# Altium PCB BubblePCB.PcbDoc
Units mm, origin at the board's own origin, x right, y up, seen from the top; angles counter-clockwise.
Board outline 171.22 x 55.3 mm, 2 copper layers (Top Layer, Bottom Layer); 45 components, 64 nets, 196 pads, 3 vias.
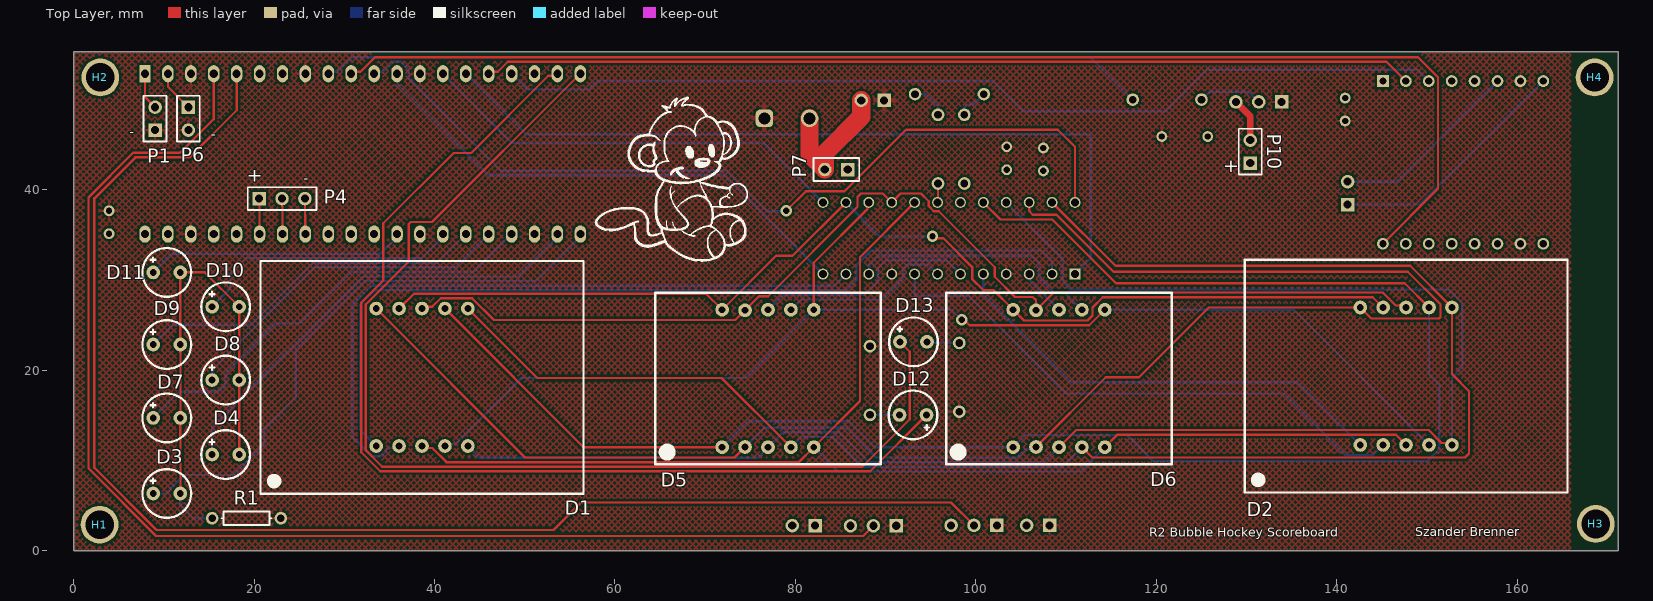
[diagram p0: Top Layer view]
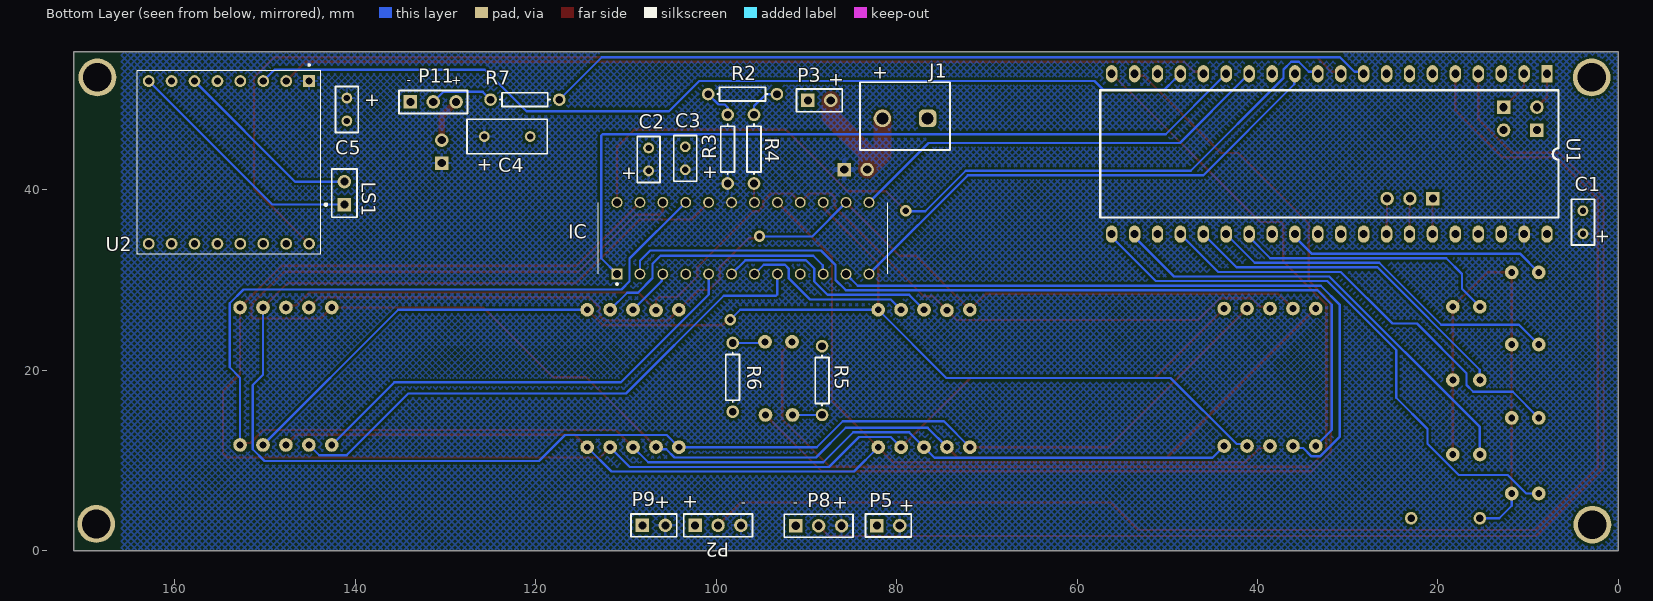
[diagram p1: Bottom Layer view, seen from below]

## Layer stack, top to bottom
Top Solder: solder mask 0.0102, Solder Resist, Dk 3.5
Top Layer: signal copper 0.0356
Dielectric 1: dielectric 0.32, FR-4, Dk 4.8
Bottom Layer: signal copper 0.0356
Bottom Solder: solder mask 0.0102, Solder Resist, Dk 3.5

## Board outline
0,0 0,55.296 171.221,55.296 171.221,0

## Design rules (kind name [scope] priority, off if disabled: settings)
Clearance [All] p1: gap=0.254 ignorepadtopadclearanceinfootprint=FALSE
ComponentClearance [All] p1: gap=0 collisioncheckmode=3 verticalgap=0 showdistances=TRUE
HoleSize [All] p1: absolutevalues=TRUE maxlimit=3.175 minlimit=0.025 maxpercent=80.000 minpercent=20.000
PolygonConnect [All] p1: connectstyle=Relief reliefconductorwidth=0.254 reliefentries=4 polygonreliefangle="90 Angle" airgapwidth=0.254
RoutingVias [All] p1: holewidth=0.711 width=1.27 viastyle="Through Hole" minholewidth=0.711 minwidth=1.27 maxholewidth=0.711 maxwidth=1.27
SilkToSolderMaskClearance [IsPad] p1: minsilkscreentomaskgap=0.229 clearancetoexposedcopper=TRUE
SolderMaskExpansion [All] p1: expansion=0.102 istentingtop=FALSE
SupplyNets "Schematic Supply Nets_1" [InNet('VCC')] p1: voltage=0.000
SupplyNets "Schematic Supply Nets" [InNet('GND')] p2: voltage=0.000
UnRoutedNet [All] p1: checkbadconnections=TRUE
Width [All] p1: maxlimit=5.08 minlimit=0.254 preferedwidth=0.254
26 further rules are at their usual default settings.

## Components (designator, comment, footprint, x,y, rotation, side; value= is the part's Value field where it differs from the comment)
C1 "Cap" RAD-0.1 3.912,36.398 r270 bottom value=10uF
C2 "Cap" RAD-0.1 107.493,43.358 r90 bottom value=10uF
C3 "Cap" RAD-0.1 103.429,43.485 r90 bottom value=0.1uF
C4 "Cap" RAD-0.2 123.165,45.898 r180 bottom value=1000uF
C5 "Cap" RAD-0.1 140.945,48.895 r270 bottom value=10uF
D1 "8021HA" PCBComponent_1 38.608,19.202 r0 top
D2 "8021HA" PCBComponent_1 147.701,19.329 r0 top
D3 "LED1" LED#1 10.312,6.325 r0 top
D4 "LED1" LED#1 16.84,10.643 r0 top
D5 "CL5621AH" CL5621AH 76.962,19.075 r0 top
D6 "CL5621AH" CL5621AH 109.22,19.075 r0 top
D7 "LED1" LED#1 10.312,14.707 r0 top
D8 "LED1" LED#1 16.84,18.898 r0 top
D9 "LED1" LED#1 10.312,22.835 r0 top
D10 "LED1" LED#1 16.84,27.026 r0 top
D11 "LED1" LED#1 10.312,30.836 r0 top
D12 "LED1" LED#2 93.04,15.037 r180 top
D13 "LED1" LED#1 93.091,23.139 r0 top
H1 "Hole 125mil" "Hole 125mil" 2.87,2.87 r0 top
H2 "Hole 125mil" "Hole 125mil" 2.946,52.451 r0 top
H3 "Hole 125mil" "Hole 125mil" 168.732,2.946 r0 top
H4 "Hole 125mil" "Hole 125mil" 168.605,52.451 r0 top
IC "MAX7219CNG" DIP794W47P254L3213H457Q24 97.028,34.62 r90 bottom
J1 "691137710002" 691137710002 79.07,48.158 r0 bottom
LS1 "Speaker" PIN2 141.224,38.354 r90 bottom
P1 "Select_BTN" HDR1X2 9.017,46.609 r90 top
P2 "BeamBreakReceiver2" HDR1X3 102.337,2.794 r180 bottom
P3 "DC_JACK_IN" HDR1X2 89.84,49.911 r180 bottom
P4 "Volume_POT" HDR1X3 20.549,39.014 r0 top
P5 "BeamBreakEmitter2" HDR1X2 82.194,2.769 r180 bottom
P6 "Start/RST_BTN" HDR1X2 12.7,49.149 r270 top
P7 "PWR_Switch" HDR1X2 85.801,42.24 r180 top
P8 "BeamBreakReceiver1" HDR1X3 91.186,2.743 r180 bottom
P9 "BeamBreakEmitter1" HDR1X2 108.179,2.794 r180 bottom
P10 "LED_Switch" HDR1X2 130.429,42.951 r90 top
P11 "NeoPixel" HDR1X3 133.909,49.733 r180 bottom
R1 "Res1" AXIAL-0.3 19.152,3.581 r0 top value=220
R2 "Res1" AXIAL-0.3 97.079,50.597 r0 bottom value=10K
R3 "Res1" AXIAL-0.3 98.73,44.501 r270 bottom value=10K
R4 "Res1" AXIAL-0.3 95.809,44.501 r90 bottom value=10K
R5 "Res1" AXIAL-0.3 88.265,18.847 r90 bottom value=220
R6 "Res1" AXIAL-0.3 98.171,19.202 r270 bottom value=220
R7 "Res1" AXIAL-0.3 121.209,49.987 r180 bottom value=330
U1 "Raspberry Pi Pico" "Raspberry Pi Pico" 7.899,52.857 r270 bottom
U2 "DFR0299" MODULE_DFR0299 154.026,43.028 r270 bottom

## Footprints (in the part's own frame and the unit in brackets; to place one, negate y for a bottom-side part, rotate by r counter-clockwise, add the part's x,y. Pads: shape width x height; smd on the part's side, far side on the other; paste and mask are expansions set on the pad)
691137710002 [mm] "Horizontal Cable Entry with Pressure Clamp, pitch 5mm, 02p"
  rrect50% 1.95x1.95 hole 1.3: 1(-2.5,0.25)
  round 1.95 hole 1.3: 2(2.5,0.25)
  silkscreen extent -5,-3.75 5,3.75, body extent -5,-3.75 5,3.75, height 11.6
AXIAL-0.3 [mm] "Axial Device, Thru-Hole; 2 Leads; 0.3 in Pin Spacing"
  round 1.4 hole 0.85: 1(-3.81,0) 2(3.81,0)
  silkscreen extent -2.77,-0.76 2.77,0.76
CL5621AH [mil] "7 Segment DIsplay 10 Pin Common Cathode"
  round 60 hole 30: 1(-200,-300) 2(-100,-299.21) 3(0,-300) 4(100,-300) 5(200,-300) 6(200,300) 7(100,300) 8(0,300) 9(-100,297.64) 10(-200,300)
  silkscreen extent -492,-374 492,374
DIP794W47P254L3213H457Q24 [mm]
  rect 1.21x1.21 hole 0.86: 1(-3.97,13.97)
  round 1.21 hole 0.86: 2(-3.97,11.43) 3(-3.97,8.89) 4(-3.97,6.35) 5(-3.97,3.81) 6(-3.97,1.27) 7(-3.97,-1.27) 8(-3.97,-3.81) 9(-3.97,-6.35) 10(-3.97,-8.89) 11(-3.97,-11.43) 12(-3.97,-13.97) 13(3.97,-13.97) 14(3.97,-11.43) 15(3.97,-8.89) 16(3.97,-6.35) 17(3.97,-3.81) 18(3.97,-1.27) 19(3.97,1.27) 20(3.97,3.81) 21(3.97,6.35) 22(3.97,8.89) 23(3.97,11.43) 24(3.97,13.97)
  silkscreen extent -5.17,-16.06 3.94,16.06
HDR1X2 [mm] "Connector; Header; 2 Position"
  rect 1.5x1.5 hole 0.9: 1(0,0)
  round 1.5 hole 0.9: 2(2.54,0)
  silkscreen extent -1.27,-1.27 3.81,1.27
HDR1X3 [mm] "Connector; Header; 3 Position"
  rect 1.5x1.5 hole 0.9: 1(0,0)
  round 1.5 hole 0.9: 2(2.54,0) 3(5.08,0)
  silkscreen extent -1.27,-1.27 6.35,1.27
"Hole 125mil" [mil]
  round 165 hole 125: 1(0,0)
LED#1 [mil]
  round 60 hole 30: 1(-59.05,0) 2(59.06,0)
  silkscreen extent -106,-106 106,106
LED#2 [mil]
  round 60 hole 30: 1(-59.06,0) "  "(59.05,0)
  silkscreen extent -106,-106 106,106
MODULE_DFR0299 [mm]
  rect 1.308x1.308 / inner round 1.308 / far side rect 1.308x1.308 hole 0.8: 1(-9.017,8.89)
  round 1.308 hole 0.8: 2(-9.017,6.35) 3(-9.017,3.81) 4(-9.017,1.27) 5(-9.017,-1.27) 6(-9.017,-3.81) 7(-9.017,-6.35) 8(-9.017,-8.89) 9(9.017,-8.89) 10(9.017,-6.35) 11(9.017,-3.81) 12(9.017,-1.27) 13(9.017,1.27) 14(9.017,3.81) 15(9.017,6.35) 16(9.017,8.89)
  silkscreen extent -10.9,-10.16 10.16,10.16, body extent -10.16,-10.16 10.16,10.16, height 6.25
PCBComponent_1 [mil]
  round 60 hole 30: 1(-200,-300) 2(-100,-300) 3(0,-300) 4(100,-300) 5(200,-300) 6(200,300) 7(100,300) 8(0,300) 9(-100,300) 10(-200,300)
  silkscreen extent -705,-508 705,508
PIN2 [mm] "Photosensitive Diode; 2 Leads"
  rect 1.5x1.5 hole 0.9: 1(0,0)
  round 1.5 hole 0.9: 2(2.54,0)
  silkscreen extent -1.4,-1.4 3.94,2.18
RAD-0.1 [mm] "Radial Cap, Thru-Hole; 2 Leads; 0.1 in Pin Spacing"
  round 1.2 hole 0.7: 1(-1.27,0) 2(1.27,0)
  silkscreen extent -2.54,-1.27 2.54,1.27
RAD-0.2 [mm] "Radial Cap, Thru-Hole; 2 Leads; 0.2 in Pin Spacing"
  round 1.2 hole 0.7: 1(-2.54,0) 2(2.54,0)
  silkscreen extent -4.44,-1.91 4.44,1.91
"Raspberry Pi Pico" [mil]
  rect 75x50 hole 35: 1(0,0)
  oval 75x50 hole 35: 2(0,-100) 3(0,-200) 4(0,-300) 5(0,-400) 6(0,-500) 7(0,-600) 8(0,-700) 9(0,-800) 10(0,-900) 11(0,-1000) 12(0,-1100) 13(0,-1200) 14(0,-1300) 15(0,-1400) 16(0,-1500) 17(0,-1600) 18(0,-1700) 19(0,-1800) 20(0,-1900) 21(700,-1900) 22(700,-1800) 23(700,-1700) 24(700,-1600) 25(700,-1500) 26(700,-1400) 27(700,-1300) 28(700,-1200) 29(700,-1100) 30(700,-1000) 31(700,-900) 32(700,-800) 33(700,-700) 34(700,-600) 35(700,-500) 36(700,-400) 37(700,-300) 38(700,-200) 39(700,-100) 40(700,0)
  silkscreen extent 72,-1950 628,50

## Part data
C1 C2 C3 C4 C5: "Capacitor", LatestRevisionDate=17-Jul-2002, LatestRevisionNote="Re-released for DXP Platform.", PackageDescription="Radial Cap, Thru-Hole; 2 Leads; 0.3 in Pin Spacing", PackageReference=RAD-0.3, Published=8-Jun-2000, Publisher="Altium Limited"
D1 D2: "8021AH 7 Segment Display / 1.41\"x1.02x0.39 / 35.8x25.8x14mm"
D3 D4 D7 D8 D9 D10 D11 D12 D13: "Typical RED GaAs LED", LatestRevisionDate=08-Jul-2005, LatestRevisionNote="Mech Layer 1 removed.", PackageDescription="LED; 2 Leads", PackageReference=LED-1, Published=8-Jun-2000, Publisher="Altium Limited"
D5 D6: "7 Segment Display 0.56\" / Case size 25mmx19x8", Manufacturer="XLITX TECHNOLOGY", Model Number=5621AH
IC: "IC DRVR 7 SEGMENT 8 DIGIT 24DIP", Package="DIP-24 Maxim Integrated", Availability=Warning, DigiKey-Purchase-URL=https://snapeda.com/shop?store=DigiKey&id=1086587, MF="Maxim Integrated", MP=MAX7219CNG, Price=None, SnapEDA_Link=https://www.snapeda.com/parts/MAX7219CNG/Maxim%20Integrated/view-part/1086587/?ref=snap
J1: "WR-TBL Series 1377 Horizontal Entry, THT, pitch 5mm, 2p", Manufacturer="Wurth Elektronik", Operating Temperature Max=120°C, Operating Temperature Min=-30°C, Rated Current=16A, Working Voltage=300V, Application="Pressure Clamp", Category="Terminal Blocks", ComponentLink1Description="Website Link", ComponentLink1URL=https://www.we-online.com/redexpert/article/691137710002?ad, ComponentLink2Description="Datasheet Link", ComponentLink2URL=https://www.we-online.com/redexpert/spec/691137710002?ad, Manufacturer Part Number=691137710002, Match Code=WR-TBL, Modularity=No, Mount="Through Hole", Number of Pins=2, Number of Rows=1, Orientation=Horizontal, Packaging=Box, Pitch=5mm
LS1: "Loudspeaker", LatestRevisionDate=17-Jul-2002, LatestRevisionNote="Re-released for DXP Platform.", PackageReference=PIN2, Published=24-Mar-1999, Publisher="Altium Limited"
P1 P3 P5 P6 P7 P9 P10: library part "Header 2H", "Header, 2-Pin, Right Angle", LatestRevisionDate=17-Jul-2002, LatestRevisionNote="Re-released for DXP Platform.", Publisher="Altium Limited"
P2 P4 P8 P11: library part "Header 3", "Header, 3-Pin", LatestRevisionDate=17-Jul-2002, LatestRevisionNote="Re-released for DXP Platform.", Publisher="Altium Limited"
R1 R2 R3 R4 R5 R6 R7: "Resistor", LatestRevisionDate=17-Jul-2002, LatestRevisionNote="Re-released for DXP Platform.", PackageDescription="Axial Device, Thru-Hole; 2 Leads; 0.3 in Pin Spacing", PackageReference=AXIAL-0.3, Published=8-Jun-2000, Publisher="Altium Limited"
U2: "- MP3 Player Audio Arduino Platform Evaluation Expansion Board", Package=None, Check_prices=https://www.snapeda.com/parts/DFR0299/DFRobot/view-part/?ref=eda, MF=DFRobot, MP=DFR0299, SnapEDA_Link=https://www.snapeda.com/parts/DFR0299/DFRobot/view-part/?ref=snap

## Via types
v1: diameter 1.27, hole 0.711, Top Layer to Bottom Layer, 3 vias

## Nets (pads, with @x,y where several pads share a name; then routed paths per layer and width w, separated by ;. In a path a pad name is that pad's centre, name@x,y a point inside that pad or via, vN(x,y) a via of type N, cw(c..) or ccw(c..) an arc to the next point about the centre after c; other vN are vias at no path point)
ADC_IN: P4.2 U1.34 | length 4
  Top Layer w0.254: P4.2 23.089,38.176 23.139,38.125 U1.34
ADC_VREF: P4.1 U1.35 | length 4
  Top Layer w0.254: P4.1 20.599,39.014 U1.35
AGND: P4.3 U1.33 | length 4
  Top Layer w0.254: P4.3 25.629,37.262 25.679,37.211 U1.33
BeamBreak_Pin: P8.2 U1.4 | length 143.1
  Top Layer w0.254: U1.4 15.519,47.829 11.785,44.094 6.579,44.094 1.626,39.141 1.626,9.111 9.125,1.612 87.515,1.612 P8.2
BeamBreak_Pin2: P2.2 U1.5 | length 156.4
  Top Layer w0.254: U1.5 18.059,48.819 12.827,43.586 6.833,43.586 2.286,39.04 2.286,9.169 9.184,2.272 53.182,2.272 56.244,5.334 97.257,5.334 P2.2
BUSY: U1.10 U2.16 | length 143.2
  Top Layer w0.254: U1.10 30.99,53.088 31.775,53.088 33.387,54.699 149.025,54.699 151.251,52.473 151.251,40.126 U2.16
COLON1: D12.1 U1.19 | length 118.7
  Top Layer w0.254: U1.19 53.389,52.627 52.603,52.627 44.057,44.081 42.125,44.081 34.315,36.271 34.315,29.945 31.877,27.506 31.877,10.899 33.987,8.788 88.292,8.788 D12.1
COLON2: D13.1 U1.20 | length 125.3
  Top Layer w0.254: U1.20 56.159,52.815 55.69,52.345 55.647,52.345 39.713,36.411 37.351,36.411 37.135,36.195 37.135,32.046 32.385,27.296 32.385,11.109 34.198,9.296 87.416,9.296 92.683,14.563 92.683,22.047 D13.1
CS: IC.12 U1.12 | length 57.1
  Bottom Layer w0.254: U1.12 35.916,52.78 35.916,51.688 46.015,41.589 72.119,41.589 IC.12
DIG0: D1.1 IC.2 | length 98.5
  Bottom Layer w0.254: D1.1 31.75,13.36 31.75,27.254 33.35,28.854 85.623,28.854 86.766,29.997 86.766,31.648 88.392,33.274 107.315,33.274 108.458,32.131 IC.2
DIG1: D1.2 IC.11 | length 77.3
  Bottom Layer w0.254: D1.2 35.849,11.363 34.925,11.363 34.001,10.439 33.055,10.439 30.861,12.633 30.861,27.232 32.992,29.362 84.31,29.362 IC.11
DIG2: D5.8 IC.6 | length 25.1
  Bottom Layer w0.254: D5.8 78.613,28.346 87.655,28.346 89.124,29.815 89.124,31.263 90.043,32.182 96.766,32.182 IC.6
DIG3: D5.7 IC.7 | length 19.4
  Bottom Layer w0.254: D5.7 80.645,27.838 89.611,27.838 91.973,30.201 91.973,31.267 92.38,31.674 94.734,31.674 IC.7
DIG4: D6.8 IC.3 | length 5.3
  Bottom Layer w0.254: IC.3 106.035,30.533 106.035,29.881 D6.8
DIG5: D6.7 IC.10 | length 28.4
  Bottom Layer w0.254: IC.10 88.177,30.689 88.177,31.636 89.23,32.69 106.172,32.69 107.061,31.801 107.061,30.201 108.672,28.59 109.865,28.59 D6.7
DIG6: D2.1 IC.5 | length 51
  Bottom Layer w0.254: IC.5 100.838,28.381 110.575,18.644 135.687,18.644 D2.1
DIG7: D2.2 IC.8 | length 62.1
  Bottom Layer w0.254: IC.8 93.218,28.394 93.367,28.245 99.162,28.245 110.007,17.399 134.137,17.399 140.97,10.566 144.018,10.566 D2.2
DP: D1.10 D2.10 D5.2 D6.2 IC.22 | length 187.3
  Top Layer w0.254: D1.10 50.038,10.312 73.259,10.312 D5.2 ; IC.22 105.918,37.643 106.324,37.236 108.941,37.236 115.265,30.912 147.895,30.912 151.511,27.296 151.511,25.879 151.362,25.73 143.84,25.73 D2.10 125.816,26.949 118.079,19.212 114.417,19.212 D6.2
  Bottom Layer w0.254: D5.2 76.561,13.614 85.649,13.614 88.951,10.312 104.613,10.312 105.537,11.236 106.441,11.236 D6.2
GND: C1.1 C2.2 C3.2 C4.2 C5.2 IC.4 IC.9 J1.1 P1.1 P2.1 P3.1 P5.1 P6.2 P8.1 P9.1 P11.1 R1.2 R5.2 R6.2 U1.3 U1.8 U1.13 U1.18 U1.23 U1.28 U1.38 U2.7 U2.10
LED0: D3.1 U1.21 | length 63.5
  Bottom Layer w0.254: D3.1 10.196,6.325 12.24,8.368 17.682,8.368 21.144,11.83 21.144,13.481 24.607,16.943 24.607,22.23 32.247,29.87 51.27,29.87 56.159,34.76 U1.21
LED1: D4.1 U1.22 | length 50.4
  Bottom Layer w0.254: D4.1 15.34,13.682 32.037,30.378 49.238,30.378 53.619,34.76 U1.22
LED2: D7.1 U1.24 | length 49
  Bottom Layer w0.254: D7.1 11.708,17.602 16.078,17.602 16.815,18.339 16.815,19.66 22.318,25.162 25.035,25.162 30.759,30.886 44.348,30.886 48.027,34.565 48.07,34.565 48.539,35.035 U1.24
LED3: D8.1 U1.25 | length 38.1
  Bottom Layer w0.254: D8.1 15.349,18.906 15.349,20.041 26.703,31.394 42.316,31.394 45.487,34.565 45.53,34.565 45.999,35.035 U1.25
LED4: D9.1 U1.26 | length 39.7
  Bottom Layer w0.254: D9.1 11.003,25.025 19.615,25.025 26.492,31.902 40.284,31.902 42.947,34.565 42.99,34.565 43.459,35.035 U1.26
LED5: D10.1 U1.27 | length 30.1
  Bottom Layer w0.254: D10.1 17.329,29.014 17.329,30.665 19.074,32.41 38.57,32.41 40.919,34.76 U1.27
LED6: D11.1 U1.29 | length 29
  Bottom Layer w0.254: D11.1 10.895,32.918 11.786,32.918 33.998,32.918 35.839,34.76 U1.29
MISO: IC.24 U1.11 | length 96.4
  Top Layer w0.254: v1(78.994,37.668) 81.143,39.817 85.417,39.817 92.26,46.66 109.093,46.66 110.998,44.755 IC.24
  Bottom Layer w0.254: U1.11 33.53,53.088 34.315,53.088 35.419,54.191 36.26,54.191 37.109,53.342 37.109,52.373 47.385,42.097 72.329,42.097 76.822,37.604 78.93,37.604 v1(78.994,37.668)
MOSI: IC.1 U1.15 | length 88.2
  Bottom Layer w0.254: U1.15 43.459,52.815 43.929,52.345 43.971,52.345 50.165,46.152 112.602,46.152 112.751,46.003 112.751,32.403 IC.1
NEOPIXEL_DATA: R7.2 U1.9 | length 91.9
  Bottom Layer w0.254: U1.9 28.45,53.088 29.235,53.088 30.847,54.699 112.687,54.699 R7.2
NetD3_2: D3.2 D4.2 D7.2 D8.2 D9.2 D10.2 D11.2 R1.1 | length 54.5
  Top Layer w0.254: D3.2 11.836,6.349 11.836,12.649 11.812,12.673 D7.2 11.836,14.731 11.836,21.869 11.812,21.893 D9.2 11.812,29.285 D11.2 14.53,30.836 D10.2 18.339,27.024 D8.2 D8.2 18.34,14.427 D4.2
  Bottom Layer w0.254: D3.2 11.812,4.953 13.184,3.581 R1.1
NetD12_2: "D12.  " R5.1 | length 3.3
  Bottom Layer w0.254: R5.1 91.54,15.037
NetD13_2: D13.2 R6.1 | length 3.7
  Bottom Layer w0.254: D13.2 94.591,23.012 R6.1
NetIC_18: IC.18 R4.1 | length 2.1
  Top Layer w0.254: IC.18 95.809,38.641 R4.1
NetJ1_2: J1.2 P3.2 P7.2 | length 15.7
  Top Layer w2.032: J1.2 81.57,43.931 P7.2 83.261,44.056 87.3,48.095 P3.2
NetP1_2: P1.2 U1.1 | length 4.2
  Top Layer w0.254: U1.1 7.899,50.267 P1.2
NetP6_1: P6.1 U1.2 | length 4.6
  Top Layer w0.254: U1.2 10.439,51.41 P6.1
NetP10_2: P10.2 P11.3 | length 4.9
  Top Layer w0.762: P11.3 130.429,48.133 P10.2
NetP11_2: P11.2 R7.1 | length 7.2
  Bottom Layer w0.254: R7.1 125.896,50.864 130.238,50.864 P11.2
NetP12_1: 
NetP12_2: 
NetP13_1: 
NetP13_2: 
NetP14_1: 
NetP14_2: 
NetP14_3: 
NetP15_1: 
NetP15_2: 
NetP16_1: 
NetP16_2: 
NetR2_1: R2.1 R4.2 | length 4.1
  Bottom Layer w0.254: R2.1 94.488,50.597 95.809,49.276 R4.2
NetR2_2: R2.2 R3.1 | length 3.6
  Bottom Layer w0.254: R3.1 98.73,49.124 99.06,49.454 99.746,49.454 R2.2
RX_MP3: U1.16 U2.2 | length 103.1
  Top Layer w0.254: U1.16 46.23,53.088 47.015,53.088 48.119,54.191 145.529,54.191 U2.2
SCLK: IC.13 U1.14 | length 48.1
  Bottom Layer w0.254: U1.14 40.919,52.815 41.389,52.345 41.431,52.345 48.59,45.187 76.462,45.187 IC.13
SEGA: D1.9 D2.9 D5.10 D6.10 IC.14 | length 123.7
  Top Layer w0.254: D1.9 37.719,28.473 70.104,28.473 D5.10 77.859,32.673 79.681,32.673 IC.14 ; v1(95.199,34.823) 95.394,34.629 96.41,34.629 99.593,31.445 99.593,30.099 100.818,28.874 101.961,28.874 D6.10 105.343,25.492 112.379,25.492 112.928,26.042 112.928,26.94 114.081,28.092 144.018,28.092 D2.9
  Bottom Layer w0.254: IC.14 89.365,34.823 v1(95.199,34.823)
SEGB: D1.8 D2.8 D5.9 D6.9 IC.16 | length 126.3
  Top Layer w0.254: D1.8 38.827,27.042 39.751,27.042 40.675,27.965 44.161,27.965 46.574,25.552 73.339,25.552 D5.9 75.981,28.194 76.987,28.194 86.893,38.1 86.893,39.192 87.277,39.576 89.692,39.576 IC.16 91.664,39.576 93.926,39.576 94.772,38.73 94.772,38.182 95.35,37.604 95.898,37.604 102.108,31.394 102.108,30.344 104.334,28.118 106.324,28.118 106.68,27.762 D6.9 108.645,28.6 145.126,28.6 146.558,27.169 147.482,27.169 D2.8
SEGC: D1.7 D2.7 D5.1 D6.1 IC.20 | length 191.7
  Top Layer w0.254: D1.7 56.515,11.455 D5.1 ; IC.20 102.725,36.703 108.483,36.703 115.545,29.642 147.549,29.642 D2.7
  Bottom Layer w0.254: D5.1 74.752,14.326 85.979,14.326 88.849,11.455 D6.1 105.486,12.802 116.764,12.802 119.634,9.931 150.079,9.931 151.384,11.236 151.384,18.349 150.241,19.492 D2.7
SEGD: D1.6 D2.6 D5.4 D6.4 IC.23 | length 186.9
  Top Layer w0.254: D1.6 51.371,19.139 71.819,19.139 D5.4 ; IC.23 115.476,31.572 148.158,31.572 D2.6 152.781,19.564 154.686,17.659 154.686,10.766 154.232,10.312 112.903,10.312 D6.4
  Bottom Layer w0.254: D5.4 80.645,12.598 84.176,12.598 87.503,9.271 109.576,9.271 D6.4
SEGE: D1.5 D2.5 D5.3 D6.3 IC.21 | length 187.2
  Top Layer w0.254: D6.3 111.125,13.36 150.206,13.36 151.638,11.929 152.562,11.929 D2.5
  Bottom Layer w0.254: D1.5 44.983,10.287 75.794,10.287 D5.3 78.613,13.106 84.811,13.106 88.138,9.779 107.544,9.779 D6.3 ; IC.21 109.601,32.367 109.601,29.845 110.507,28.939 152.408,28.939 153.924,27.423 153.924,20.309 152.781,19.166 D2.5
SEGF: D1.4 D2.4 D5.6 D6.6 IC.15 | length 137.4
  Top Layer w0.254: D5.6 82.042,31.902 87.991,37.851 87.991,38.443 IC.15 ; v1(98.45,25.578) 98.7,25.578 99.294,24.984 112.589,24.984 D6.6
  Bottom Layer w0.254: D1.4 41.367,11.802 42.291,11.802 49.628,19.139 74.486,19.139 D5.6 97.333,26.695 v1(98.45,25.578) ; D6.6 135.255,26.695 D2.4
SEGG: D1.3 D2.3 D5.5 D6.5 IC.17 | length 145.6
  Top Layer w0.254: D1.3 38.827,11.363 39.751,11.363 41.31,9.804 80.391,9.804 D5.5 87.152,16.565 87.152,32.524 IC.17 ; D6.5 115.697,12.852 146.558,12.852 D2.3
  Bottom Layer w0.254: D5.5 84.734,8.763 111.608,8.763 D6.5
SPK1: LS1.2 U2.6 | length 21.2
  Bottom Layer w0.254: LS1.2 146.685,40.894 U2.6
SPK2: LS1.1 U2.8 | length 27.4
  Bottom Layer w0.254: LS1.1 149.225,38.354 U2.8
TX_MP3: U1.17 U2.3 | length 106.6
  Bottom Layer w0.254: U1.17 48.539,52.815 49.12,52.234 49.163,52.234 50.292,51.105 57.125,51.105 58.064,52.045 101.879,52.045 105.232,48.692 121.031,48.692 125.654,53.315 148.946,53.315 U2.3
VCC: C1.2 C2.1 C3.1 C4.1 C5.1 IC.19 P2.3 P5.2 P7.1 P8.3 P9.2 P10.1 R3.2 U1.39 U2.1
pads on no net: H1.1 H2.1 H3.1 H4.1 U1.6 U1.7 U1.30 U1.31 U1.32 U1.36 U1.37 U1.40 U2.4 U2.5 U2.9 U2.11 U2.12 U2.13 U2.14 U2.15

## Polygon pours and split planes (outlines as drawn)
GND on Top Layer "GND_L01_P005" (hatched 45Degree grid 0.508 track 0.203, pour order 5): 0.127,55.169 0.127,0.127 165.913,0.127 165.913,55.169
VCC on Bottom Layer "VCC_L02_P004" (hatched 45Degree grid 0.508 track 0.203, pour order 4): 0.127,55.169 0.127,0.127 165.913,0.127 165.913,55.169

## Silkscreen, mask and mechanical layers (free items; w line width, h text height)
Top Overlay:
  drawing of 6 lines, arcs and shapes, not listed
  text "-" at 6.223,45.931 h1
  text "-" at 15.24,45.627 h1
  text "+" at 20.955,42.164 h1.52 r180
  text "+" at 127.432,41.961 h1.52
  text "-" at 25.984,41.546 h1 r180
  text "Szander Brenner" at 148.742,1.575 h1
  text "R2 Bubble Hockey Scoreboard" at 119.253,1.552 h1
Bottom Overlay:
  text "+" at 128.219,52.541 h1 r180
  text "-" at 133.782,52.443 h1 r180
  text "+" at 82.728,52.299 h1.52
  text "+" at 87.605,51.511 h1.52
  text "+" at 139.014,49.276 h1.52
  text "+" at 126.543,42.113 h1.52
  text "+" at 101.524,41.25 h1.52
  text "+" at 110.515,41.173 h1.52
  text "+" at 2.362,35.687 h1.52 r90
  text "+" at 102.006,5.994 h1.52 r180
  text "+" at 105.08,5.969 h1.52 r180
  text "+" at 85.369,5.918 h1.52 r180
  text "-" at 96.723,5.656 h1 r180
  text "-" at 90.932,5.605 h1 r180
  text "+" at 79.781,4.318 h1.52
Mechanical 1:
  the board outline again, w0.254